# Altium PCB VFD Ura Controll.PcbDoc
Units mm, origin at the board's own origin, x right, y up, seen from the top; angles counter-clockwise.
Board outline 100 x 50 mm, 2 copper layers (Top Layer, Bottom Layer); 53 components, 35 nets, 170 pads, 367 vias.
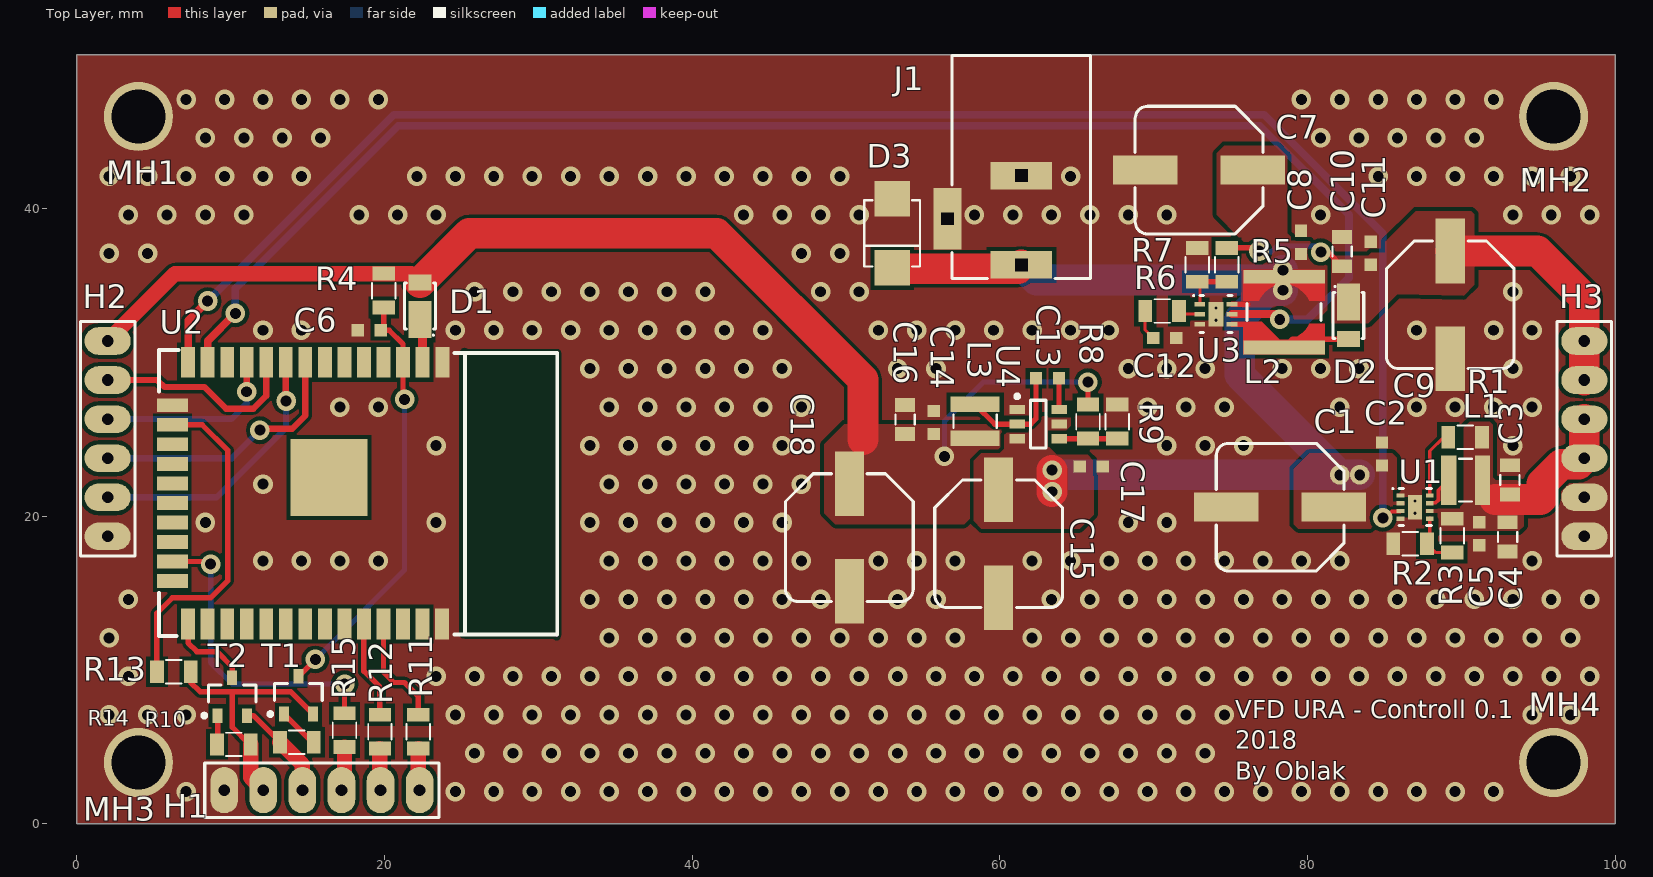
[diagram p0: Top Layer view]
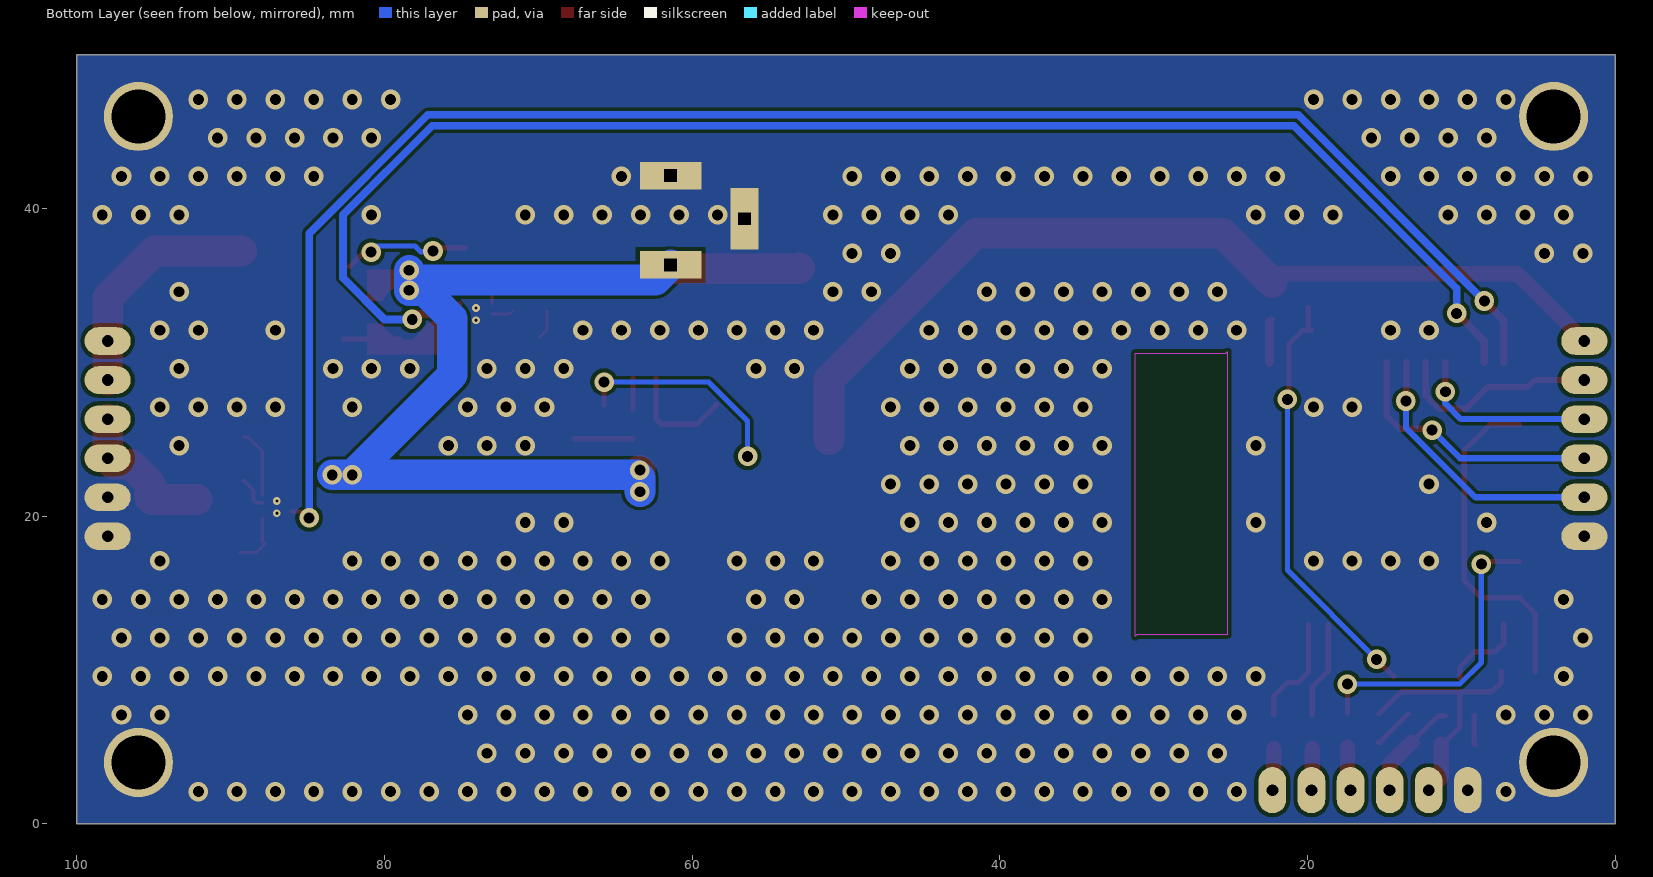
[diagram p1: Bottom Layer view, seen from below]
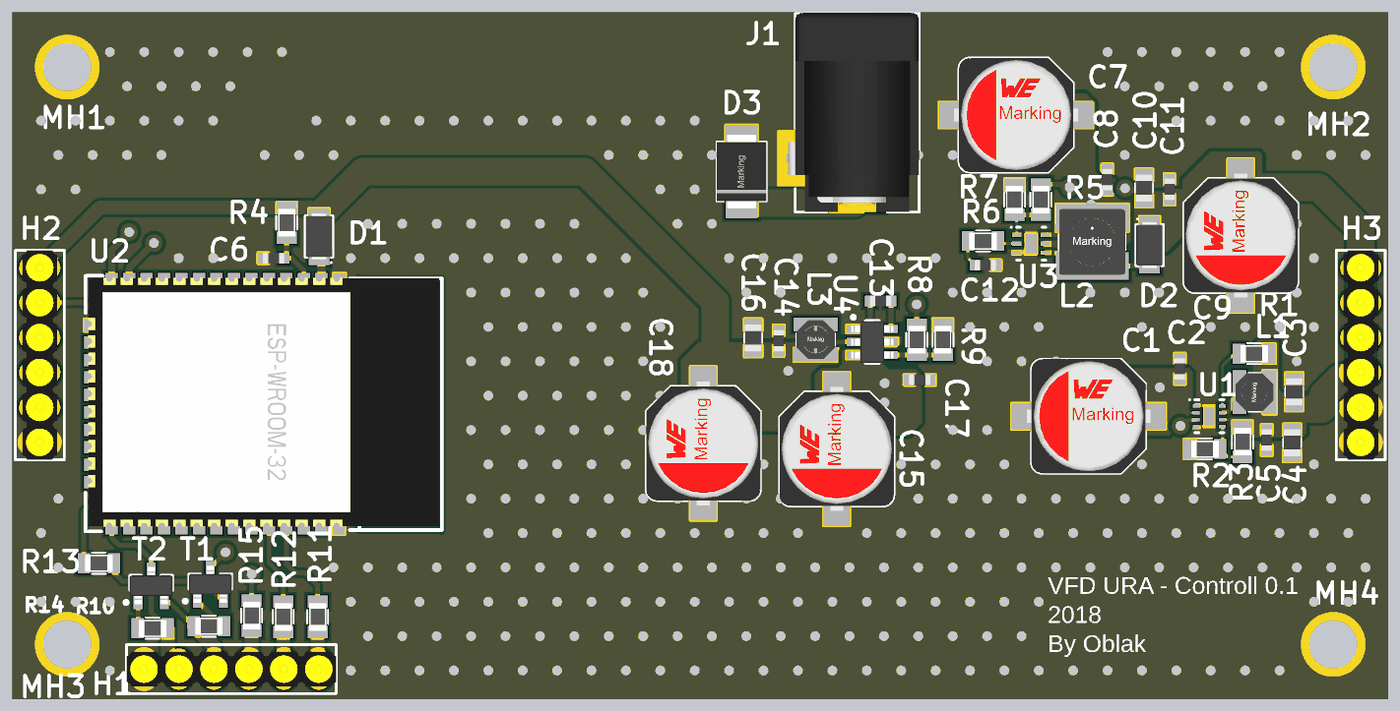
[diagram p2: 3D render of the assembled board from above, using the file's embedded part models]

## Layer stack, top to bottom
Top Solder: solder mask 0.0102, Solder Resist, Dk 3.5
Top Layer: signal copper 0.0356
Dielectric 1: dielectric 0.32, FR-4, Dk 4.8
Bottom Layer: signal copper 0.0356
Bottom Solder: solder mask 0.0102, Solder Resist, Dk 3.5

## Board outline
0,0 100,0 100,50 0,50

## Design rules (kind name [scope] priority, off if disabled: settings)
Clearance [All] p1: gap=0.254 ignorepadtopadclearanceinfootprint=FALSE except(0: Arc-Hole Track-Hole SMDPad-Hole THPad-Hole Via-Hole Fill-Hole Poly-Hole Region-Hole Text-Hole; 0.15: SMDPad-SMDPad; 0.2: Arc-Arc Arc-Track Arc-SMDPad Arc-Fill Arc-Poly Arc-Region Track-Track Track-SMDPad Track-Fill Track-Poly Track-Region)
PlaneClearance PlaneClearance_1 [InNet('+1.5V')] p1: clearance=0.2
PlaneClearance [All] p2: clearance=0.3
PolygonConnect PolygonConnect_1 [All] p1: connectstyle=Direct reliefconductorwidth=0.254 reliefentries=4 polygonreliefangle="90 Angle" airgapwidth=0.254
PolygonConnect [InNet('+1.5V')] p2: connectstyle=Direct reliefconductorwidth=0.254 reliefentries=4 polygonreliefangle="90 Angle" airgapwidth=0.254
RoutingVias [All] p1: holewidth=0.711 width=1.27 viastyle="Through Hole" minholewidth=0.711 minwidth=1.27 maxholewidth=0.711 maxwidth=1.27
SolderMaskExpansion [All] p1: expansion=0.102
Width [All] p1: maxlimit=5 minlimit=0.2 preferedwidth=0.35 minimp=50.000000 maximp=50.000000 favimp=50.000000
29 further rules are at their usual default settings.

## Components (designator, comment, footprint, x,y, rotation, side; value= is the part's Value field where it differs from the comment)
C1 "875075555002" WCAP-PSLC_8x11.7 78.219,20.6 r0 top value=47uF
C2 "25V, 100nF" "0603_1.6x0.8x0.8mm_Reflow Soldering" 84.85,24.05 r270 top value=100nF
C3 "6.3V, 22uF" "0805_2x1.25x1.25mm_Reflow Soldering" 93.162,22.373 r270 top value=22uF
C4 "6.3V, 4.7uF" "0805_2x1.25x1.25mm_Reflow Soldering" 93.016,18.669 r90 top value=4.7uF
C5 "25V, 100nF" "0603_1.6x0.8x0.8mm_Reflow Soldering" 91.162,18.869 r90 top value=100nF
C6 "1nF" "0603_1.6x0.8x0.8mm_Reflow Soldering" 19,32.1 r0 top value=100nF
C7 "875075555002" WCAP-PSLC_8x11.7 72.95,42.512 r0 top value=47uF
C8 "25V, 100nF" "0603_1.6x0.8x0.8mm_Reflow Soldering" 79.581,37.809 r270 top value=100nF
C9 "875075555002" WCAP-PSLC_8x11.7 89.284,33.75 r90 top value=47uF
C10 "25V, 4.7uF" "0805_2x1.25x1.25mm_Reflow Soldering" 82.25,37.209 r270 top value=4.7uF
C11 "25V, 100nF" "0603_1.6x0.8x0.8mm_Reflow Soldering" 84.104,37.104 r270 top value=100nF
C12 "25V, 10nF" "0603_1.6x0.8x0.8mm_Reflow Soldering" 70.721,31.594 r180 top value=10nF
C13 "25V, 100nF" "0603_1.6x0.8x0.8mm_Reflow Soldering" 63.1,28.979 r0 top value=100nF
C14 "25V, 100nF" "0603_1.6x0.8x0.8mm_Reflow Soldering" 55.7,26.1 r270 top value=100nF
C15 "875075555002" WCAP-PSLC_8x11.7 59.921,18.219 r90 top value=47uF
C16 "6.3V, 22uF" "0805_2x1.25x1.25mm_Reflow Soldering" 53.846,26.3 r270 top value=22uF
C17 "25V, 100nF" "0603_1.6x0.8x0.8mm_Reflow Soldering" 65.95,23.246 r180 top value=100nF
C18 "875075555002" WCAP-PSLC_8x11.7 50.221,18.619 r90 top value=47uF
D1 "DFLS1100" PowerDi123 22.3,33.676 r270 top
D2 "DFLS1100" PowerDi123 82.659,33.05 r90 top
D3 "Unidirectional, 600 W, 15 VDC" DO-214AA_Unidirectional 53,38.4 r90 top
H1 "header6" Letev6 22.28,2.2 r0 top
H2 "header6" Letev6 2,31.4 r90 top locked
H3 "header6" Letev6 98,31.4 r90 top locked
J1 "694106301002" 694106301002 61.4,42.7 r180 top
L1 "744028002" WE-TPC_2811 90.281,22.35 r90 top value=2.2uH
L2 "744042180" WE-TPC_4818 78.479,33.279 r0 top value=18uH
L3 "744025003" WE-TPC_2828 58.394,26.177 r0 top value=3.3uH
MH1 "Mounting Hole M3" "Mounting Hole M3"#1 4,46 r0 top
MH2 "Mounting Hole M3" "Mounting Hole M3"#2 97,45 r0 top
MH3 "Mounting Hole M3" "Mounting Hole M3"#3 4,5 r0 top
MH4 "Mounting Hole M3" "Mounting Hole M3"#4 97,4 r0 top
R1 "Res2-smd" RES0805_1 90.25,25.15 r0 top value=100k
R2 "Res2-smd" RES0805_1 86.673,18.219 r0 top value=150k
R3 "Res2-smd" RES0805_1 89.406,18.743 r90 top value=130k
R4 "12k" RES0805_1 19.944,34.681 r90 top
R5 "Res2-smd" RES0805_1 74.748,36.356 r90 top value=160k
R6 "Res2-smd" RES0805_1 70.55,33.35 r0 top value=17k8
R7 "Res2-smd" RES0805_1 72.841,36.356 r270 top value=10k5
R8 "Res2-smd" RES0805_1 65.731,26.165 r90 top value=33k2
R9 "Res2-smd" RES0805_1 67.638,26.165 r270 top value=10k
R10 "12k" RES0805_1 14.3,5.317 r180 top
R11 "12k" RES0805_1 22.2,6 r90 top value=0R
R12 "12k" RES0805_1 19.7,6 r90 top value=0R
R13 "12k" RES0805_1 6.3,9.9 r180 top value=0R
R14 "12k" RES0805_1 10.2,5.173 r0 top
R15 "12k" RES0805_1 17.4,6.1 r90 top value=0R
T1 "BC847" SOT23 14.4,8.373 r90 top
T2 "BC847" SOT23 10.1,8.273 r90 top
U1 "TPS62170DSGR" DSG8-1600X900TP 87,20.6 r0 top
U2 "ESP32-WROOM" ESP32-WROOM 7.23,30.018 r270 top
U3 "TPS61170DRVR" DRV6-1600X1000TP 74.05,33.15 r0 top
U4 "TP561208" "SOT23-6 TI" 62.5,26 r0 top

## Footprints (in the part's own frame and the unit in brackets; to place one, negate y for a bottom-side part, rotate by r counter-clockwise, add the part's x,y. Pads: shape width x height; smd on the part's side, far side on the other; paste and mask are expansions set on the pad)
"0603_1.6x0.8x0.8mm_Reflow Soldering" [mm] "Ceramic Capacitors, 0603, body 1.6x0.8mm"
  rect 0.8x0.8 smd: 1(-0.75,0) 2(0.75,0)
  body extent -0.8,-0.4 0.8,0.4, height 0.83
"0805_2x1.25x1.25mm_Reflow Soldering" [mm] "Ceramic Capacitors, 0805, body 2x1.25mm"
  rect 0.9x1.3 smd: 1(-0.95,0) 2(0.95,0)
  silkscreen extent -0.32,-0.62 0.32,0.63, body extent -1,-0.62 1,0.63, height 1.28
694106301002 [mm] "DC Power Jack Right Angled(6.4)"
  rect 4x1.8 hole 0.8 square: 1(0,6.35) 2(0,0.55)
  rect 1.8x4 hole 0.8 square: 3(4.8,3.35)
  silkscreen extent -4.5,-7.25 4.5,7.25, body extent -4.5,-7.25 5,7.25, height 10.75
DO-214AA_Unidirectional [mm] "WE-TVSP Power TVS Diode, DO-214AA, Unidirectional"
  rect 2.3x2.3 smd: 1(-2.25,0) 2(2.25,0)
  silkscreen extent -2.16,-1.81 2.16,1.81, body extent -2.7,-1.81 2.7,1.81, height 2.4
DRV6-1600X1000TP [mm] "SON, 6-Leads, Body 2x2mm, Pitch 0.65mm, Thermal Pad 1.6x1mm, TI Recommended"
  rect 0.7x0.3 smd paste-0.025 mask+0.07: 1(-1.05,0.65) 2(-1.05,0) 3(-1.05,-0.65) 4(1.05,-0.65) 5(1.05,0) 6(1.05,0.65)
  rect 1x1.6 smd paste-0.5 mask+0.07: 7(0,0)
  silkscreen extent -1.5,-1.2 1.05,1.25, body extent -1.05,-1.05 1.05,1.05, height 0.8
DSG8-1600X900TP [mm] "SON, 8-Leads, Body 2x2mm, Pitch 0.5mm, Thermal Pad 1.6x0.9mm, TI Recommended"
  rect 0.5x0.28 smd paste-0.14 mask+0.07: 1(-0.95,0.75) 2(-0.95,0.25) 3(-0.95,-0.25) 4(-0.95,-0.75) 5(0.95,-0.75) 6(0.95,-0.25) 7(0.95,0.25) 8(0.95,0.75)
  rect 0.9x1.6 smd paste-0.45 mask+0.07: 9(0,0)
  silkscreen extent -1.5,-1.2 1.05,1.25, body extent -1.05,-1.05 1.05,1.05, height 0.8
ESP32-WROOM [mm]
  rect 2x0.9 smd: 1(0,16.54) 2(0,15.24) 3(0,13.97) 4(0,12.7) 5(0,11.43) 6(0,10.16) 7(0,8.89) 8(0,7.62) 9(0,6.35) 10(0,5.08) 11(0,3.81) 12(0,2.54) 13(0,1.27) 14(0,0) 25(17.018,0) 26(17.018,1.27) 27(17.018,2.54) 28(17.018,3.81) 29(17.018,5.08) 30(17.018,6.35) 31(17.018,7.62) 32(17.018,8.89) 33(17.018,10.16) 34(17.018,11.43) 35(17.018,12.7) 36(17.018,13.97) 37(17.018,15.24) 38(17.018,16.51)
  rect 0.9x2 smd: 15(2.794,-1.016) 16(4.064,-1.016) 17(5.334,-1.016) 18(6.604,-1.016) 19(7.874,-1.016) 20(9.144,-1.016) 21(10.414,-1.016) 22(11.684,-1.016) 23(12.954,-1.016) 24(14.224,-1.016)
  rect 5x5 smd: ""(7.5,9.16)
  Top Layer keep-out region: -0.6,17.9 17.7,17.9 17.7,24 -0.6,24
  silkscreen extent -0.8,-1.91 17.8,24, body extent -0.64,-1.7 17.44,23.84, height 3
Letev6 [mm]
  oval 1.8x3 hole 0.762: 1(0,0) 2(-2.54,0) 3(-5.08,0) 4(-7.62,0) 5(-10.16,0) 6(-12.7,0)
  silkscreen extent -13.97,-1.78 1.27,1.78, body extent -13.97,-1.27 1.27,1.27, height 1.8
"Mounting Hole M3"#1 [mm]
  round 4.5 hole 3.5: 1(0,0)
"Mounting Hole M3"#2 [mm]
  round 4.5 hole 3.5: 1(-1,1)
"Mounting Hole M3"#3 [mm]
  round 4.5 hole 3.5: 1(0,-1)
"Mounting Hole M3"#4 [mm]
  round 4.5 hole 3.5: 1(-1,0)
PowerDi123 [mm] "Molded Diode, 2-Leads, Body 2,80x1,78mm, IPC Medium Density"
  rect 1.05x1.5 smd: 1(-1.524,0)
  rect 2.4x1.5 smd: 2(0.889,0)
  silkscreen extent -1.5,-1 1.95,1, body extent -1.72,-0.96 1.72,0.96, height 1
RES0805_1 [mm]
  rect 0.9x1.45 smd: 1(-1.1,0) 2(1.1,0)
  silkscreen extent -0.51,-0.76 0.51,0.76, body extent -1,-0.64 1,0.62, height 0.62
SOT23 [mm] "SOT23, 3-Leads, Body 2,93x2,40mm, Pitch 0,95mm, IPC Medium Density"
  rect 0.95x0.65 smd: 1(-1.225,0.95) 2(-1.225,-0.95) 3(1.225,0)
  silkscreen extent -1.35,-1.55 0.75,1.95, body extent -1.35,-1.57 1.35,1.57, height 1.2
"SOT23-6 TI" [mm] "SOT23, 6-Leads, Body 2,90x2,80mm, Pitch 0,95mm, IPC Medium Density"
  rect 1x0.6 smd: 1(-1.375,0.95) 2(-1.375,0) 3(-1.375,-0.95) 4(1.375,-0.95) 5(1.375,0) 6(1.375,0.95)
  silkscreen extent -1.5,-1.55 0.5,1.92, body extent -1.53,-1.53 1.53,1.53, height 1.1
WCAP-PSLC_8x11.7 [mm] "Aluminium Polymer V-Chip SMT Capacitors, §¶8x11.7mm"
  rect 4.2x1.9 smd: 1(3.5,0) 2(-3.5,0)
  silkscreen extent -4.15,-4.15 4.15,4.15, body extent -4.5,-4.15 4.5,4.15, height 11.7
WE-TPC_2811 [mm] "Power Inductor, SMD, 2-Leads, body 2.8x2.8mm"
  rect 3.2x1 smd: 1(0,1.1) 2(0,-1.1)
  silkscreen extent -1.39,-0.42 1.39,0.42, body extent -1.39,-1.39 1.39,1.39, height 1.16
WE-TPC_2828 [mm] "Power Inductor, SMD, 2-Leads, body 2.8x2.8mm"
  rect 3.2x1 smd: 1(0,1.1) 2(0,-1.1)
  silkscreen extent -1.4,-0.43 1.4,0.43, body extent -1.4,-1.4 1.4,1.4, height 2.82
WE-TPC_4818 [mm] "Power Inductor, SMD, 2-Leads, body 4.8x4.8mm"
  rect 5.3x0.9 smd paste-403.566 mask-403.566: 1(0,2.3) 2(0,-2.3)
  Top Layer region: 2.65,-0.75 1.636,-0.75 1.636,-0.75 1.138,-1.394 0.407,-1.753 -0.407,-1.753 -1.138,-1.394 -1.636,-0.75 -1.636,-0.75 -2.65,-0.75 -2.65,-0.75 -2.65,-2.75 2.65,-2.75
  Top Layer region: -2.65,0.75 -1.636,0.75 -1.636,0.75 -1.138,1.394 -0.407,1.753 0.407,1.753 1.138,1.394 1.636,0.75 1.636,0.75 2.65,0.75 2.65,0.75 2.65,2.75 -2.65,2.75
  silkscreen extent -2.4,-0.55 2.4,0.55, body extent -2.4,-2.4 2.4,2.4, height 1.8

## Part data
C1 C7 C9 C15 C18: "WCAP-PSLC Aluminum Polymer Capacitors, size ?8x11.7mm, 25V DC, 47uF", Operating Temperature="-55 °C up to +105 °C", Rated Voltage="25V DC", ComponentLink1Description=Manufacturer, ComponentLink1URL=http://www.we-online.de, ComponentLink2Description=Datasheet, ComponentLink2URL=http://katalog.we-online.de/pbs/datasheet/875075555002.pdf, Life Cycle=2000h, Part Number=875075555002, Published Date="June 2017", Publisher="Wurth Elektronik", Size=?8x11.7mm
C2 C5 C6 C8 C11 C13 C14 C17: library part 885012206071, "WCAP-CSGP Ceramic Capacitors, 0603, X7R, 25V, 100nF", Operating Temperature="-55 °C to +125 °C", Rated Voltage="25V DC", Ceramic Type=X7R, ComponentLink1Description=Manufacturer, ComponentLink1URL=http://www.we-online.de, ComponentLink2Description=Datasheet, ComponentLink2URL=http://katalog.we-online.de/pbs/datasheet/885012206071.pdf, Part Number=885012206071, Published Date="Oct. 2017", Publisher="Wurth Elektronik", Size=0603
C3 C16: library part 885012107005, "WCAP-CSGP Ceramic Capacitors, 0805, X5R, 6.3V, 22uF", Operating Temperature="-55 °C to +125 °C", Rated Voltage="6.3V DC", Ceramic Type=X5R, ComponentLink1Description=Manufacturer, ComponentLink1URL=http://www.we-online.de, ComponentLink2Description=Datasheet, ComponentLink2URL=http://katalog.we-online.de/pbs/datasheet/885012107005.pdf, Part Number=885012107005, Published Date="Oct. 2017", Publisher="Wurth Elektronik", Size=0805
C4: library part 885012107003, "WCAP-CSGP Ceramic Capacitors, 0805, X5R, 6.3V, 4.7uF", Operating Temperature="-55 °C to +125 °C", Rated Voltage="6.3V DC", Ceramic Type=X5R, ComponentLink1Description=Manufacturer, ComponentLink1URL=http://www.we-online.de, ComponentLink2Description=Datasheet, ComponentLink2URL=http://katalog.we-online.de/pbs/datasheet/885012107003.pdf, Part Number=885012107003, Published Date="Oct. 2017", Publisher="Wurth Elektronik", Size=0805
C10: library part 885012107018, "WCAP-CSGP Ceramic Capacitors, 0805, X5R, 25V, 4.7uF", Operating Temperature="-55 °C to +125 °C", Rated Voltage="25V DC", Ceramic Type=X5R, ComponentLink1Description=Manufacturer, ComponentLink1URL=http://www.we-online.de, ComponentLink2Description=Datasheet, ComponentLink2URL=http://katalog.we-online.de/pbs/datasheet/885012107018.pdf, Part Number=885012107018, Published Date="Oct. 2017", Publisher="Wurth Elektronik", Size=0805
C12: library part 885012206065, "WCAP-CSGP Ceramic Capacitors, 0603, X7R, 25V, 10nF", Operating Temperature="-55 °C to +125 °C", Rated Voltage="25V DC", Ceramic Type=X7R, ComponentLink1Description=Manufacturer, ComponentLink1URL=http://www.we-online.de, ComponentLink2Description=Datasheet, ComponentLink2URL=http://katalog.we-online.de/pbs/datasheet/885012206065.pdf, Part Number=885012206065, Published Date="Oct. 2017", Publisher="Wurth Elektronik", Size=0603
D3: library part "WE-TVSP DO-214AA, 824520151", "WE-TVSP Power TVS Diode, Unidirectional, 600 W, 15 VDC", Manufacturer="Wurth Elektronik", partNo=824520151, ComponentLink1Description=Manufacturer, ComponentLink1URL=http://www.we-online.de, ComponentLink2Description=Datasheet, ComponentLink2URL=http://katalog.we-online.de/pbs/datasheet/824520151.pdf, Created by="Baojun Chen", Created Date=Nov.2015
J1: "DC Power Jack Right Angled(6.4) WR-DC", Rated Current="5 A", Withstanding Voltage="500 VAC", Working Voltage="24 VAC", ComponentLink1Description=Manufacturer, ComponentLink1URL=http://www.we-online.de, ComponentLink2Description=Datasheet, ComponentLink2URL=http://katalog.we-online.com/em/datasheet/6941xx301002.pdf, Opening Diameter="6.4 mm", Part Number=694106301002, Plug OD="5.5 mm", Published Date="September 2017", Publisher="Wurth Elektronik"
L1: "WE-TPC SMD Shielded Tiny Power Inductor, size 2811, 1.3A, 125mO, 2.2uH", DC Resistance=125mO, Rated Current=1.3A, ComponentLink1Description=Manufacturer, ComponentLink1URL=http://www.we-online.de, ComponentLink2Description=Datasheet, ComponentLink2URL=http://katalog.we-online.de/pbs/datasheet/744028002.pdf, Part Number=744028002, Published Date="July 2017", Publisher="Wurth Elektronik", Size=2811
L2: "WE-TPC SMD Shielded Tiny Power Inductor, size 4818, 0.92A, 270mO, 18uH", DC Resistance=270mO, Rated Current=0.92A, ComponentLink1Description=Manufacturer, ComponentLink1URL=http://www.we-online.de, ComponentLink2Description=Datasheet, ComponentLink2URL=http://katalog.we-online.de/pbs/datasheet/744042180.pdf, Part Number=744042180, Published Date="July 2017", Publisher="Wurth Elektronik", Size=4818
L3: "WE-TPC SMD Shielded Tiny Power Inductor, size 2828, 1.5A, 85mO, 3.3uH", DC Resistance=85mO, Rated Current=1.5A, ComponentLink1Description=Manufacturer, ComponentLink1URL=http://www.we-online.de, ComponentLink2Description=Datasheet, ComponentLink2URL=http://katalog.we-online.de/pbs/datasheet/744025003.pdf, Part Number=744025003, Published Date="July 2017", Publisher="Wurth Elektronik", Size=2828
R4 R10 R11 R12 R13 R14 R15: library part Res2-smd
T1 T2: "45 V, 100 mA NPN general-purpose transistors"
U1: "Buck Step Down Regulator with 3 to 17 V Input and 0.9 to 6 V Output, -40 to 85 degC, 8-Pin WSON (DSG), Green (RoHS & no Sb/Br)", Manufacturer="Texas Instruments", Rating=Catalog, Supplier Part Number 1=296-29865-2-ND, Switch Current Limit(Typ)(A)=1.05, Code_JEDEC=MO-229, ComponentLink1Description=Datasheet, ComponentLink1URL=http://www.ti.com/general/docs/lit/getliterature.tsp?genericPartNumber=TPS62170&fileType=pdf, ComponentLink2Description="Package Specification", ComponentLink2URL=http://www.ti.com/litv/pdf/mpds308a, ComponentLink3Description="URL Link1", ComponentLink3URL="Samples URL:http://www.ti.com/product/tps62170#samples", DatasheetVersion=SLVSAT8A, Duty Cycle(Max)(%)=100, Eco-Plan="Green (RoHS & no Sb/Br)", Iout(Max)(A)=0.5, Iq(Typ)(mA)=0.017, Mounting Technology="Surface Mount", PackageDescription="8-Pin Plastic Small Outline No-Lead, 2 x 2 x 0.8 mm Body, 0.5 mm Pitch, Exposed Pad", PackageReference=DSG8-1600X900TP, PackageVersion="revB, Oct-2010", PartNumber=TPS62170DSGR, Regulated Outputs(#)=1, SubFamily="Step-Down Regulator", Supplier 1=Digi-Key, Supplier 2=Digi-Key, Supplier 3=Digi-Key, Supplier 4=Newark, Supplier 5=Mouser, Supplier Part Number 2=296-29865-1-ND, Supplier Part Number 3=296-29865-6-ND, Supplier Part Number 4=74T5561, Supplier Part Number 5=595-TPS62170DSGR, Synchronous Rectification=TRUE, Topology=Buck, Vin(Max)(V)=17, Vin(Min)(V)=3, Vout(Max)(V)=6, Vout(Min)(V)=0.9
U3: "Boost Voltage Converter with 3 to 18 V Input and 3 to 38 V Output, -40 to 85 degC, 6-Pin SON (DRC), Green (RoHS & no Sb/Br)", Dynamic Voltage Scaling=TRUE, Manufacturer="Texas Instruments", Supplier Part Number 1=296-22945-2-ND, Switching Frequency(Max)(kHz)=1200, ComponentLink1Description=Datasheet, ComponentLink1URL=http://www.ti.com/general/docs/lit/getliterature.tsp?genericPartNumber=TPS61170&fileType=pdf, ComponentLink2Description="Package Specification", ComponentLink2URL=http://www.ti.com/litv/pdf/mpds216d, DatasheetVersion=SLVS789C, Eco-Plan="Green (RoHS & no Sb/Br)", Mounting Technology="Surface Mount", PackageDescription="6-Pin Plastic Small Outline No-Lead, 2 x 2 x 0.8 mm Body, 0.65 mm Pitch, Exposed Pad", PackageReference=DRV6-1600X1000TP, PackageVersion="revE, Oct-2010", PartNumber=TPS61170DRVR, Regulated Outputs(#)=1, SubFamily="Step-Up Regulator", Supplier 1=Digi-Key, Supplier 2=Digi-Key, Supplier 3=Digi-Key, Supplier 4=Newark, Supplier 5=Mouser, Supplier Part Number 2=296-22945-1-ND, Supplier Part Number 3=296-22945-6-ND, Supplier Part Number 4=65M6341, Supplier Part Number 5=595-TPS61170DRVR, Topology=Boost, Vin(Max)(V)=18, Vin(Min)(V)=3, Vout(Max)(V)=38, Vout(Min)(V)=3
U4: library part TPS561208

## Via types
v1: diameter 1.27, hole 0.711, Top Layer to Bottom Layer, tented both sides, 363 vias
v2: diameter 0.5, hole 0.2, Top Layer to Bottom Layer, tented both sides, 4 vias

## Nets (pads, with @x,y where several pads share a name; then routed paths per layer and width w, separated by ;. In a path a pad name is that pad's centre, name@x,y a point inside that pad or via, vN(x,y) a via of type N, cw(c..) or ccw(c..) an arc to the next point about the centre after c; other vN are vias at no path point)
+1.5V: C3.2 C4.2 C5.2 H3.3 H3.4 L1.2 R1.2 R3.2 U1.6 | length 10
  Top Layer w2: 92.2,21.1 95.146,21.1 95.246,21.2 95.246,22.132 96.508,23.394 97.614,23.394 H3.4 H3.3
+3V3: C14.2 C16.2 C18.1 D1.1 H2.1 L3.2 R4.2 R8.2 | length 74.5
  Top Layer w0.35: R8.2 v1(65.731,28.731)
  Top Layer w1: H2.1 6.381,35.781 R4.2 21.719,35.781 D1.1
  Top Layer w2: D1.1 25.5,38.4 41.6,38.4 51.1,28.9 51.1,25
  Bottom Layer w0.35: v1(56.4,23.9) 56.4,26.2 58.931,28.731 v1(65.731,28.731)
+12: C1.1 C2.2 C7.1 C8.2 C15.1 C17.2 D3.1 J1.1 L2.1 U1.2 U3.6 U4.3 U4.5 | length 67.4
  Top Layer w0.35: U3.6 76.107,33.8
  Top Layer w2: D3.1 53.054,36.096 61.2,36.096 61.2,36.15 J1.1 ; v1(63.4,21.6) v1(63.4,23)
  Bottom Layer w2: J1.1 62.389,35.361 77.632,35.361 77.686,35.414 v1(78.4,34.7) ; v1(63.4,21.6) 63.4,22.5 63.6,22.7 v1(82.1,22.7) ; v1(78.4,36) v1(78.4,34.7) ; v1(83.4,22.7) v1(82.1,22.7) ; v1(78.4,34.7) 78.389,34.689 77.417,34.689 75.6,32.872 75.6,29.2 v1(82.1,22.7)
+30V: C9.1 C10.2 C11.2 D2.2 H3.1 H3.2 R5.2 | length 23.7
  Top Layer w0.35: R5.2 76.644,37.456 v1(76.85,37.25) ; v1(80.87,37.181) 81.327,37.181 C10.2
  Top Layer w2: C9.1 94.95,37.25 98,34.2 H3.1 H3.2
  Bottom Layer w0.35: v1(76.85,37.25) 76.801,37.201 77.657,37.201 78.03,37.575 80.476,37.575 v1(80.87,37.181)
CTS: H1.3 R15.1 | length 2.9
  Top Layer w1: H1.3 17.4,2.4 R15.1
DTR: H1.4 R10.2 T2.2 | length 6.6
  Top Layer w0.35: T2.2 11.469,7.048 R10.2
  Top Layer w1: R10.2 14.66,3.857 H1.4
EN: C6.2 R4.1 T1.3 U2.3 | length 27.9
  Top Layer w0.35: T1.3 15.5,10.698 v1(15.5,10.7) ; R4.1 19.944,32.294 C6.2 20.3,32.1 21.2,31.2 U2.3 21.2,27.7 v1(21.3,27.6)
  Bottom Layer w0.35: v1(15.5,10.7) 21.3,16.5 v1(21.3,27.6)
GND: C1.2 C2.1 C3.1 C4.1 C5.1 C6.1 C7.2 C8.1 C9.2 C10.1 C11.1 C12.1 C14.1 C15.2 C16.1 C17.1 C18.2 D3.2 H1.6 H2.6 H3.5 H3.6 J1.2 J1.3 MH1.1 MH2.1 MH3.1 MH4.1 R2.1 R7.1 R9.1 U1.1 U1.4 U1.9 U2.1 U2.15 U2.38 U3.3 U3.7 U4.1
  other v1: 7.1,2.1 24.6,2.1 27.1,2.1 29.6,2.1 32.1,2.1 34.6,2.1 37.1,2.1 39.6,2.1 42.1,2.1 44.6,2.1 47.1,2.1 49.6,2.1 52.1,2.1 54.6,2.1 57.1,2.1 59.6,2.1 62.1,2.1 64.6,2.1 67.1,2.1 69.6,2.1 72.1,2.1 74.6,2.1 77.1,2.1 79.6,2.1 82.1,2.1 84.6,2.1 87.1,2.1 89.6,2.1 92.1,2.1 25.85,4.6 28.35,4.6 30.85,4.6 33.35,4.6 35.85,4.6 38.35,4.6 40.85,4.6 43.35,4.6 45.85,4.6 48.35,4.6 50.85,4.6 53.35,4.6 55.85,4.6 58.35,4.6 60.85,4.6 63.35,4.6 65.85,4.6 68.35,4.6 70.85,4.6 73.35,4.6 2.1,7.1 4.6,7.1 7.1,7.1 24.6,7.1 27.1,7.1 29.6,7.1 32.1,7.1 34.6,7.1 37.1,7.1 39.6,7.1 42.1,7.1 44.6,7.1 47.1,7.1 49.6,7.1 52.1,7.1 54.6,7.1 57.1,7.1 59.6,7.1 62.1,7.1 64.6,7.1 67.1,7.1 69.6,7.1 72.1,7.1 74.6,7.1 94.6,7.1 97.1,7.1 3.35,9.6 23.35,9.6 25.85,9.6 28.35,9.6 30.85,9.6 33.35,9.6 35.85,9.6 38.35,9.6 40.85,9.6 43.35,9.6 45.85,9.6 48.35,9.6 50.85,9.6 53.35,9.6 55.85,9.6 58.35,9.6 60.85,9.6 63.35,9.6 65.85,9.6 68.35,9.6 70.85,9.6 73.35,9.6 75.85,9.6 78.35,9.6 80.85,9.6 83.35,9.6 85.85,9.6 88.35,9.6 90.85,9.6 93.35,9.6 95.85,9.6 98.35,9.6 2.1,12.1 34.6,12.1 37.1,12.1 39.6,12.1 42.1,12.1 44.6,12.1 47.1,12.1 49.6,12.1 52.1,12.1 54.6,12.1 57.1,12.1 62.1,12.1 64.6,12.1 67.1,12.1 69.6,12.1 72.1,12.1 74.6,12.1 77.1,12.1 79.6,12.1 82.1,12.1 84.6,12.1 87.1,12.1 89.6,12.1 92.1,12.1 94.6,12.1 97.1,12.1 3.35,14.6 33.35,14.6 35.85,14.6 38.35,14.6 40.85,14.6 43.35,14.6 45.85,14.6 48.35,14.6 53.35,14.6 55.85,14.6 63.35,14.6 65.85,14.6 68.35,14.6 70.85,14.6 73.35,14.6 75.85,14.6 78.35,14.6 80.85,14.6 83.35,14.6 85.85,14.6 88.35,14.6 90.85,14.6 93.35,14.6 95.85,14.6 98.35,14.6 12.1,17.1 14.6,17.1 17.1,17.1 19.6,17.1 34.6,17.1 37.1,17.1 39.6,17.1 42.1,17.1 44.6,17.1 47.1,17.1 52.1,17.1 54.6,17.1 57.1,17.1 62.1,17.1 64.6,17.1 67.1,17.1 69.6,17.1 72.1,17.1 74.6,17.1 77.1,17.1 79.6,17.1 82.1,17.1 94.6,17.1 8.35,19.6 23.35,19.6 33.35,19.6 35.85,19.6 38.35,19.6 40.85,19.6 43.35,19.6 45.85,19.6 68.35,19.6 70.85,19.6 12.1,22.1 34.6,22.1 37.1,22.1 39.6,22.1 42.1,22.1 44.6,22.1 47.1,22.1 23.35,24.6 33.35,24.6 35.85,24.6 38.35,24.6 40.85,24.6 43.35,24.6 45.85,24.6 70.85,24.6 73.35,24.6 75.85,24.6 93.35,24.6 17.1,27.1 19.6,27.1 34.6,27.1 37.1,27.1 39.6,27.1 42.1,27.1 44.6,27.1 47.1,27.1 69.6,27.1 72.1,27.1 74.6,27.1 82.1,27.1 87.1,27.1 89.6,27.1 92.1,27.1 94.6,27.1 33.35,29.6 35.85,29.6 38.35,29.6 40.85,29.6 43.35,29.6 45.85,29.6 53.35,29.6 55.85,29.6 68.35,29.6 70.85,29.6 73.35,29.6 78.35,29.6 80.85,29.6 83.35,29.6 93.35,29.6 12.1,32.1 14.6,32.1 24.6,32.1 27.1,32.1 29.6,32.1 32.1,32.1 34.6,32.1 37.1,32.1 39.6,32.1 42.1,32.1 44.6,32.1 52.1,32.1 54.6,32.1 57.1,32.1 59.6,32.1 62.1,32.1 64.6,32.1 67.1,32.1 87.1,32.1 92.1,32.1 94.6,32.1 25.85,34.6 28.35,34.6 30.85,34.6 33.35,34.6 35.85,34.6 38.35,34.6 40.85,34.6 48.35,34.6 50.85,34.6 93.35,34.6 2.1,37.1 4.6,37.1 47.1,37.1 49.6,37.1 3.35,39.6 5.85,39.6 8.35,39.6 10.85,39.6 18.35,39.6 20.85,39.6 23.35,39.6 43.35,39.6 45.85,39.6 48.35,39.6 50.85,39.6 58.35,39.6 60.85,39.6 63.35,39.6 65.85,39.6 68.35,39.6 70.85,39.6 80.85,39.6 93.35,39.6 95.85,39.6 98.35,39.6 2.1,42.1 4.6,42.1 7.1,42.1 9.6,42.1 12.1,42.1 14.6,42.1 22.1,42.1 24.6,42.1 27.1,42.1 29.6,42.1 32.1,42.1 34.6,42.1 37.1,42.1 39.6,42.1 42.1,42.1 44.6,42.1 47.1,42.1 49.6,42.1 64.6,42.1 84.6,42.1 87.1,42.1 89.6,42.1 92.1,42.1 94.6,42.1 97.1,42.1 8.35,44.6 10.85,44.6 13.35,44.6 15.85,44.6 80.85,44.6 83.35,44.6 85.85,44.6 88.35,44.6 90.85,44.6 7.1,47.1 9.6,47.1 12.1,47.1 14.6,47.1 17.1,47.1 19.6,47.1 79.6,47.1 82.1,47.1 84.6,47.1 87.1,47.1 89.6,47.1 92.1,47.1
  other v2: 87,20.2 87,21 74.05,32.75 74.05,33.55
IO0: T2.3 U2.25 | length 5.5
  Top Layer w0.35: U2.25 7.23,11.77 7.8,11.2 9.1,11.2 10.1,10.2 T2.3
IO13: R13.2 U2.16 | length 22
  Top Layer w0.35: R13.2 5.2,13.7 6.2,14.7 8.7,14.7 9.8,15.8 9.8,24.3 8.146,25.954 U2.16
IO15: R15.2 U2.23 | length 20.1
  Top Layer w0.35: U2.23 8.536,17.064 v1(8.7,16.9) ; R15.2 v1(17.4,9.1)
  Bottom Layer w0.35: v1(8.7,16.9) 8.7,10.5 10.1,9.1 v1(17.4,9.1)
NetC12_2: C12.2 R6.1 | length 2
  Top Layer w0.2: R6.1 69.45,32.115 C12.2
NetC13_1: C13.1 L3.1 U4.2 | length 7.3
  Top Layer w0.35: L3.1 59.671,26 U4.2 62,26 62.35,26.35 C13.1
NetC13_2: C13.2 U4.6 | length 2
  Top Layer w0.35: C13.2 63.85,26.975 U4.6
NetD1_2: D1.2 U2.2 | length 2.8
  Top Layer w0.4: D1.2 D1.2@22.47,32.617
  Top Layer w0.6: U2.2 D1.2@22.47,32.617
NetD2_1: D2.1 L2.2 U3.4 | length 10.3
  Top Layer w0.2: L2.2@76.621,30.979 L2.2
  Top Layer w0.35: U3.4 76.959,32.5 L2.2 79.026,31.526 D2.1
NetH2_2: H2.2 U2.10 | length 13.6
  Top Layer w0.4: H2.2 5.24,28.86 5.7,28.4 8.3,28.4 9.7,27 11.48,27 12.31,27.83 U2.10
NetH2_3: H2.3 U2.11 | length 12.1
  Top Layer w0.4: v1(11.04,28.1) U2.11
  Bottom Layer w0.4: H2.3 10.02,26.32 11.04,27.34 v1(11.04,28.1)
NetH2_4: H2.4 U2.8 | length 17.5
  Top Layer w0.4: v1(11.9,25.6) 12,25.7 14,25.7 14.85,26.55 U2.8
  Bottom Layer w0.4: H2.4 10.08,23.78 v1(11.9,25.6)
NetH2_5: H2.5 U2.9 | length 17.7
  Top Layer w0.4: U2.9 13.58,27.52 v1(13.6,27.5)
  Bottom Layer w0.4: H2.5 9.08,21.24 13.6,25.76 v1(13.6,27.5)
NetL1_1: L1.1 U1.7 | length 2.2
  Top Layer w0.254: U1.7 87.95,20.883 88.335,20.883 88.527,21.075 88.527,21.696 L1.1
NetR1_1: R1.1 U1.8 | length 4.5
  Top Layer w0.2: U1.8 87.95,24.25 88.85,25.15 R1.1
NetR2_2: R2.2 R3.1 U1.5 | length 3.6
  Top Layer w0.2: R2.2 88.35,17.643 R3.1
  Top Layer w0.254: R2.2 87.95,18.396 U1.5
NetR5_1: R5.1 R7.2 U3.1 | length 3.4
  Top Layer w0.2: R7.2 73,35.097 U3.1
  Top Layer w0.35: R7.2 R5.1
NetR6_2: R6.2 U3.2 | length 1.4
  Top Layer w0.2: R6.2 71.85,33.15 U3.2
NetR8_1: R8.1 R9.2 U4.4 | length 3.8
  Top Layer w0.35: U4.4 67.619,25.05 R9.2@67.638,25.031
NetR10_1: R10.1 T1.1 | length 2.7
  Top Layer w0.35: T1.1 15.281,5.317 R10.1
NetR14_1: R14.1 T2.1 | length 1.9
  Top Layer w0.35: R14.1 9.15,5.223 T2.1
NetU1_3: U1.3 U2.14 | length 109
  Top Layer w0.25: v1@84.8,19.9 v1(84.9,19.9) 85.06,19.9 85.475,20.315 86.015,20.315 U1.3
  Top Layer w0.5: U2.14 7.23,32.73 v1(8.5,34)
  Bottom Layer w0.5: v1(8.5,34) 20.6,46.1 77.19,46.1 84.9,38.39 v1(84.9,19.9)
NetU2_13: U2.13 U3.5 | length 97.7
  Top Layer w0.5: U2.13 8.5,31.4 v1(10.3,33.2) ; U3.5 77.95,33.15 78.2,32.9 v1(78.2,32.8)
  Bottom Layer w0.5: v1(10.3,33.2) 10.3,34.81 20.89,45.4 76.9,45.4 82.7,39.6 82.7,35.5 80,32.8 v1(78.2,32.8)
RTS: H1.5 R13.1 R14.2 T1.2 | length 16.8
  Top Layer w0.35: R13.1 7.4,9.2 8,8.6 10.1,8.6 ; R14.2 11.227,5.173 10.1,6.3 10.1,8.6 ; T1.2 13.898,8.6 10.1,8.6
  Top Layer w1: R14.2 11.3,3.02 H1.5
RXD: H1.1 R11.1 | length 2.7
  Top Layer w1: R11.1 22.2,2.28 H1.1
RXD0: R12.2 U2.34 | length 6.3
  Top Layer w0.35: U2.34 18.66,9.94 19.7,8.9 R12.2
TXD: H1.2 R12.1 | length 2.7
  Top Layer w1: R12.1 19.7,2.24 H1.2
TXD0: R11.2 U2.35 | length 7.3
  Top Layer w0.35: U2.35 19.93,9.87 20.6,9.2 21.3,9.2 22.2,8.3 R11.2
pads on no net: U2. U2.4 U2.5 U2.6 U2.7 U2.12 U2.17 U2.18 U2.19 U2.20 U2.21 U2.22 U2.24 U2.26 U2.27 U2.28 U2.29 U2.30 U2.31 U2.32 U2.33 U2.36 U2.37

## Polygon pours and split planes (outlines as drawn)
GND on Top Layer "Top Layer-GND" (solid, pour order 12): 0,50 0,0 99.9,0 100,0.1 100,50
+12 on Top Layer "Top Layer-+12" (solid, pour order 10): 86.4,21.1 86.5,21 86.5,20.6 85.5,20.6 84.1,19.2 79.4,19.2 79.1,19.5 79.1,23.1 80.1,24.1 85.5,24.1 85.8,23.8 85.8,21.2 85.9,21.1
+1.5V on Top Layer "Top Layer-+1.5V" (solid, pour order 0): 87.65,20.55 87.65,20.15 88.25,20.15 88.55,19.85 88.55,19.15 88.65,19.05 93.75,19.05 94.05,19.35 94.05,21.95 93.65,22.35 92.25,22.35 92.05,22.55 92.05,25.95 91.85,26.15 90.55,26.15 90.15,25.75 90.15,20.85 89.85,20.55
+12 on Top Layer "Top Layer-+12 1" (solid, pour order 8): 74.7,33.4 74.7,33 74.9,32.8 80.7,32.8 81.3,33.4 81.3,37.1 80.5,37.9 79.2,37.9 78.7,38.4 78.7,43.4 78,44.1 74.6,44.1 74.1,43.6 74.1,39.6 75.9,37.8 75.7,37.6 75.7,33.7 75.5,33.5 74.8,33.5
+3V3 on Top Layer "Top Layer-+3V3" (solid, pour order 6): 59.1,26 58.9,26 49.9,26 48.6,24.7 48.6,20.2 49.3,19.5 57.7,19.5 58.2,20 58.2,23.7 58.8,24.3 58.85,24.25 60.15,24.25 60.15,25.85 60,26 58.9,26
+12 on Top Layer "Top Layer-+12 2" (solid, pour order 4): 62.8,26.5 61.8,25.5 60.5,25.5 60.3,25.3 60.3,24.4 60,24.1 58.8,24.1 58.3,23.6 58.3,19.7 58.8,19.2 65.2,19.2 66.1,20.1 66.1,23.6 65.7,24 63.7,24 63.2,24.5 63.2,25.5 63.3,25.6 64.3,25.6 64.6,25.9 64.6,26.4 64.5,26.5 64.4,26.5
+30V on Top Layer "Top Layer-+30V" (solid, pour order 2): 81.55,32.55 83.75,32.55 83.95,32.55 85.85,34.45 90.15,34.35 90.85,35.05 90.85,39.65 90.65,39.85 87.05,39.85 85.05,37.85 85.05,37.15 84.15,37.15 83.95,36.95 81.75,36.95 81.55,36.75 81.55,36.45
GND on Bottom Layer "GND_L02_P014" (solid, pour order 14): 0,50 0,0 100,0 100,50

## Keep-outs
Top Layer:
  region: 25.2,12.3 31.1,12.3 31.2,12.2 31.2,30.6 25.3,30.6 25.2,30.7
Bottom Layer:
  region: 25.2,12.3 31.1,12.3 31.2,12.2 31.2,30.6 25.3,30.6 25.2,30.7

## Other copper
Top Layer:
  region: 89.15,25.15

## Silkscreen, mask and mechanical layers (free items; w line width, h text height)
Top Overlay:
  text "VFD URA - Controll 0.1 / 2018 / By Oblak" at 75.3,2.5 h2
Mechanical 1:
  the board outline again, w0.75